# Altium PCB PCB1.PcbDoc
Units mm, origin at the board's own origin, x right, y up, seen from the top; angles counter-clockwise.
Board outline 31.12 x 27.35 mm, 4 copper layers (Top Layer, Int1 (GND), Int2 (Gnd), Bottom Layer), stack 1.57 mm thick; 34 components, 27 nets, 168 pads, 63 vias.
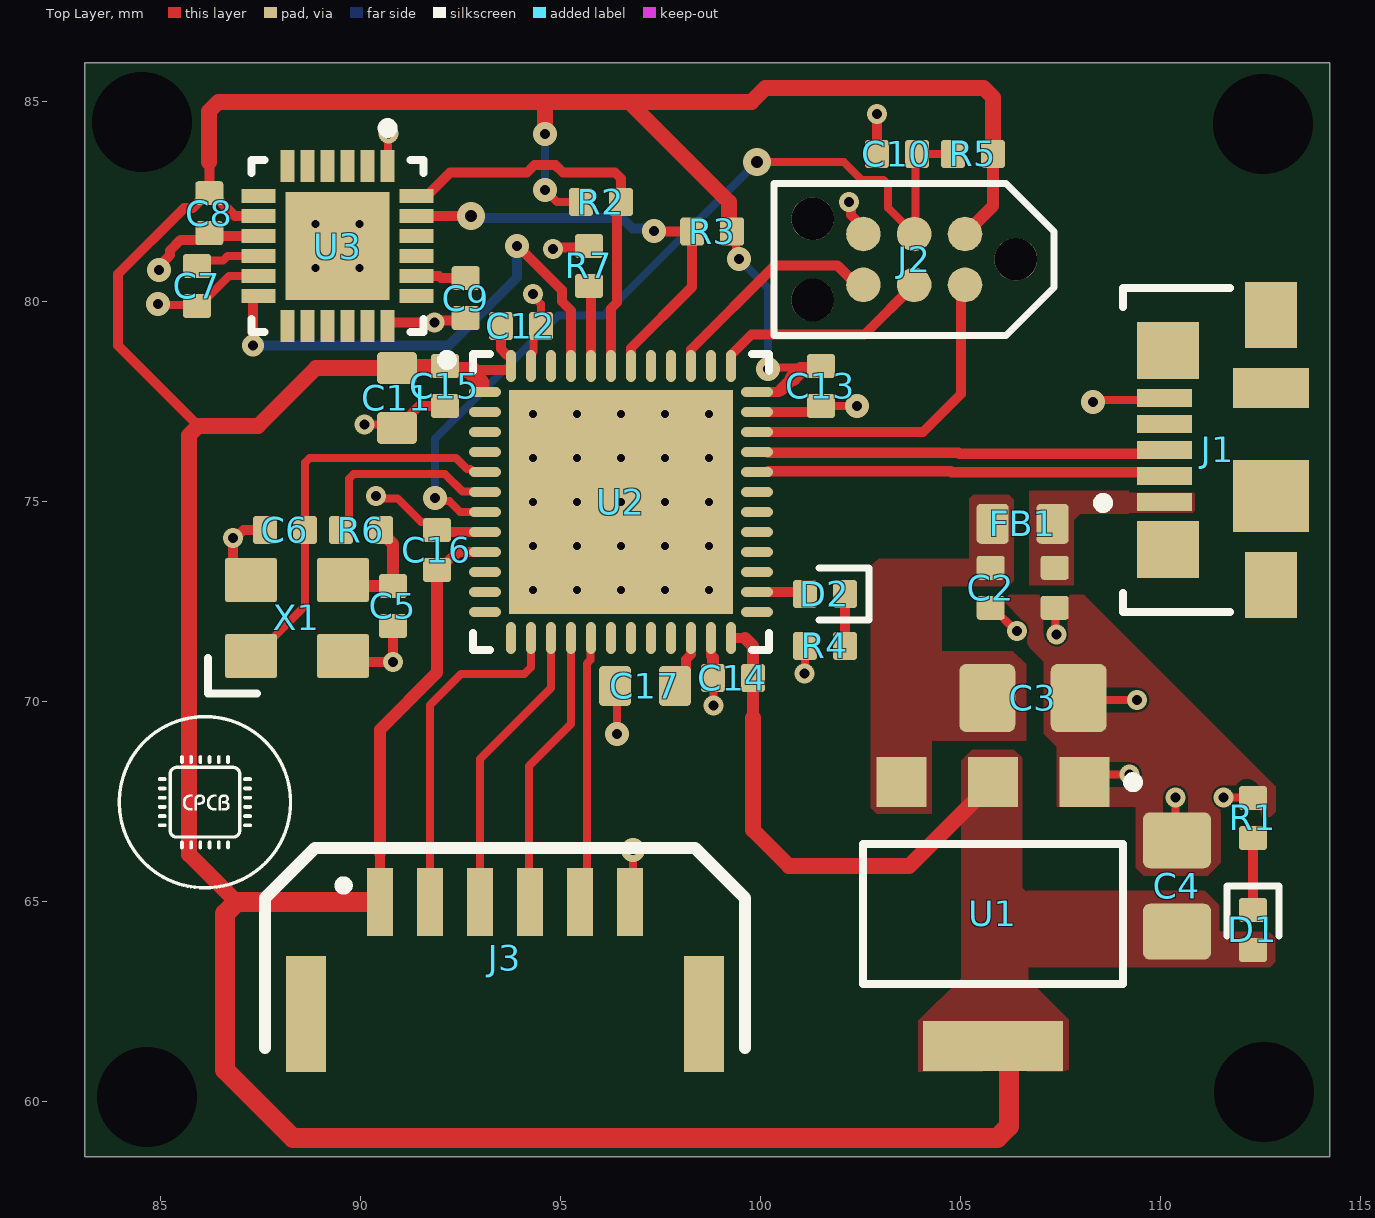
[diagram p0: Top Layer view]
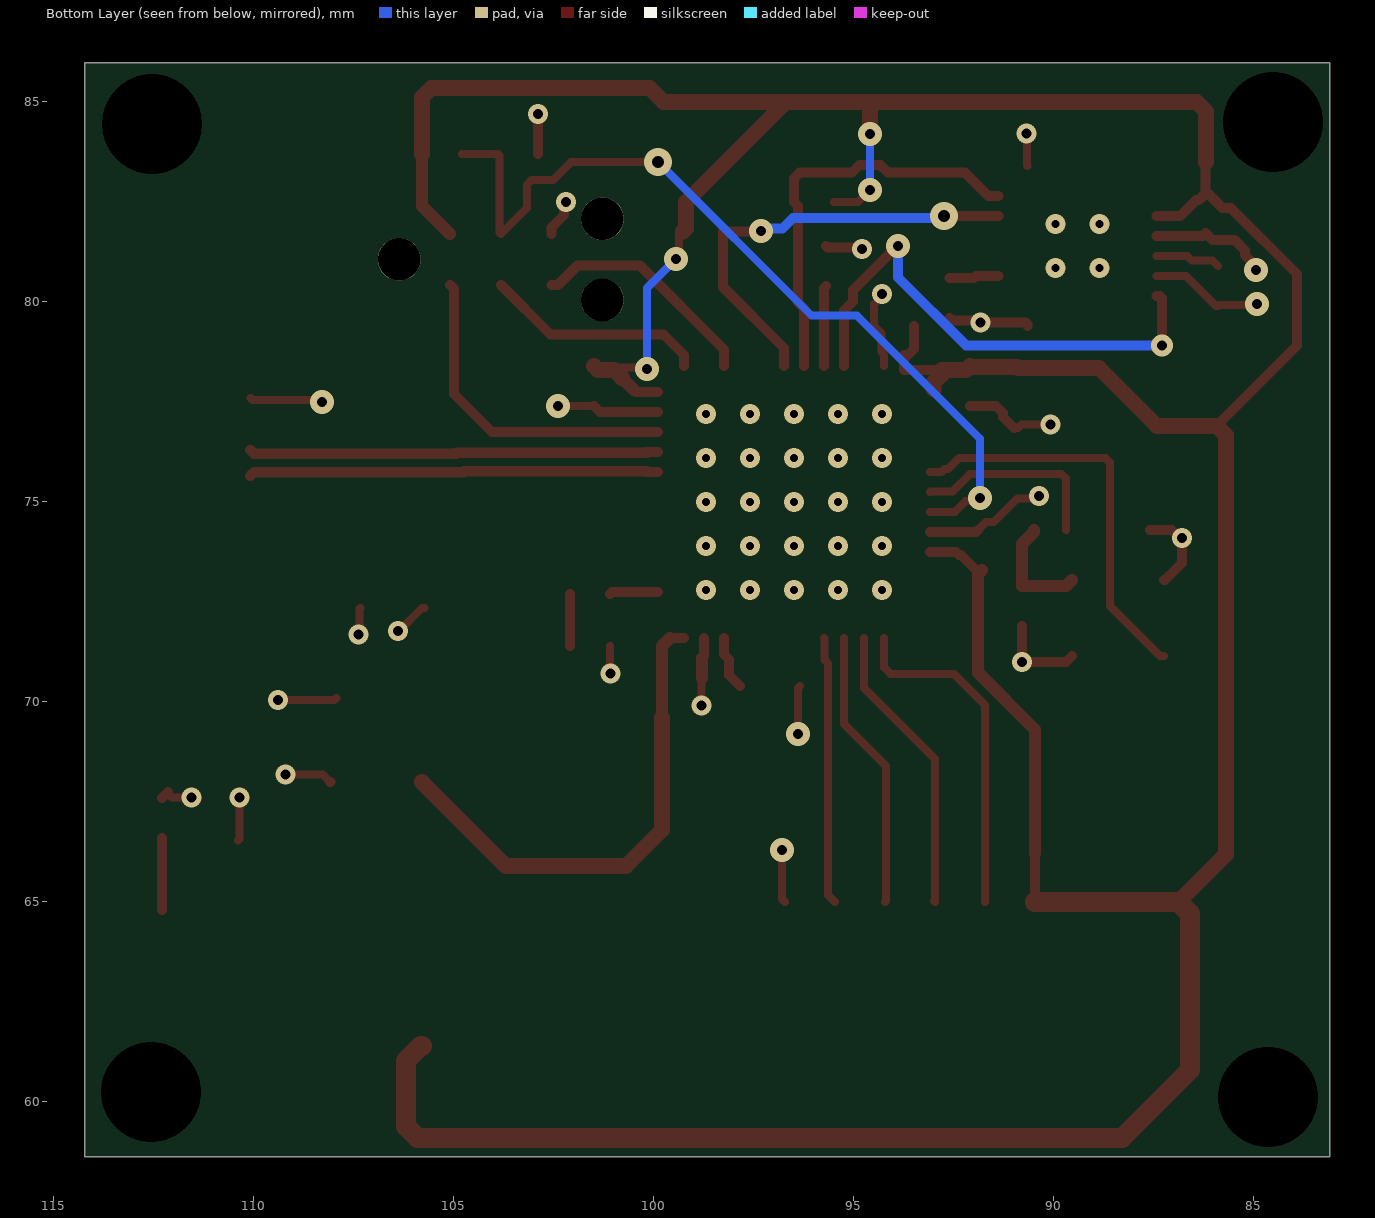
[diagram p1: Bottom Layer view, seen from below]
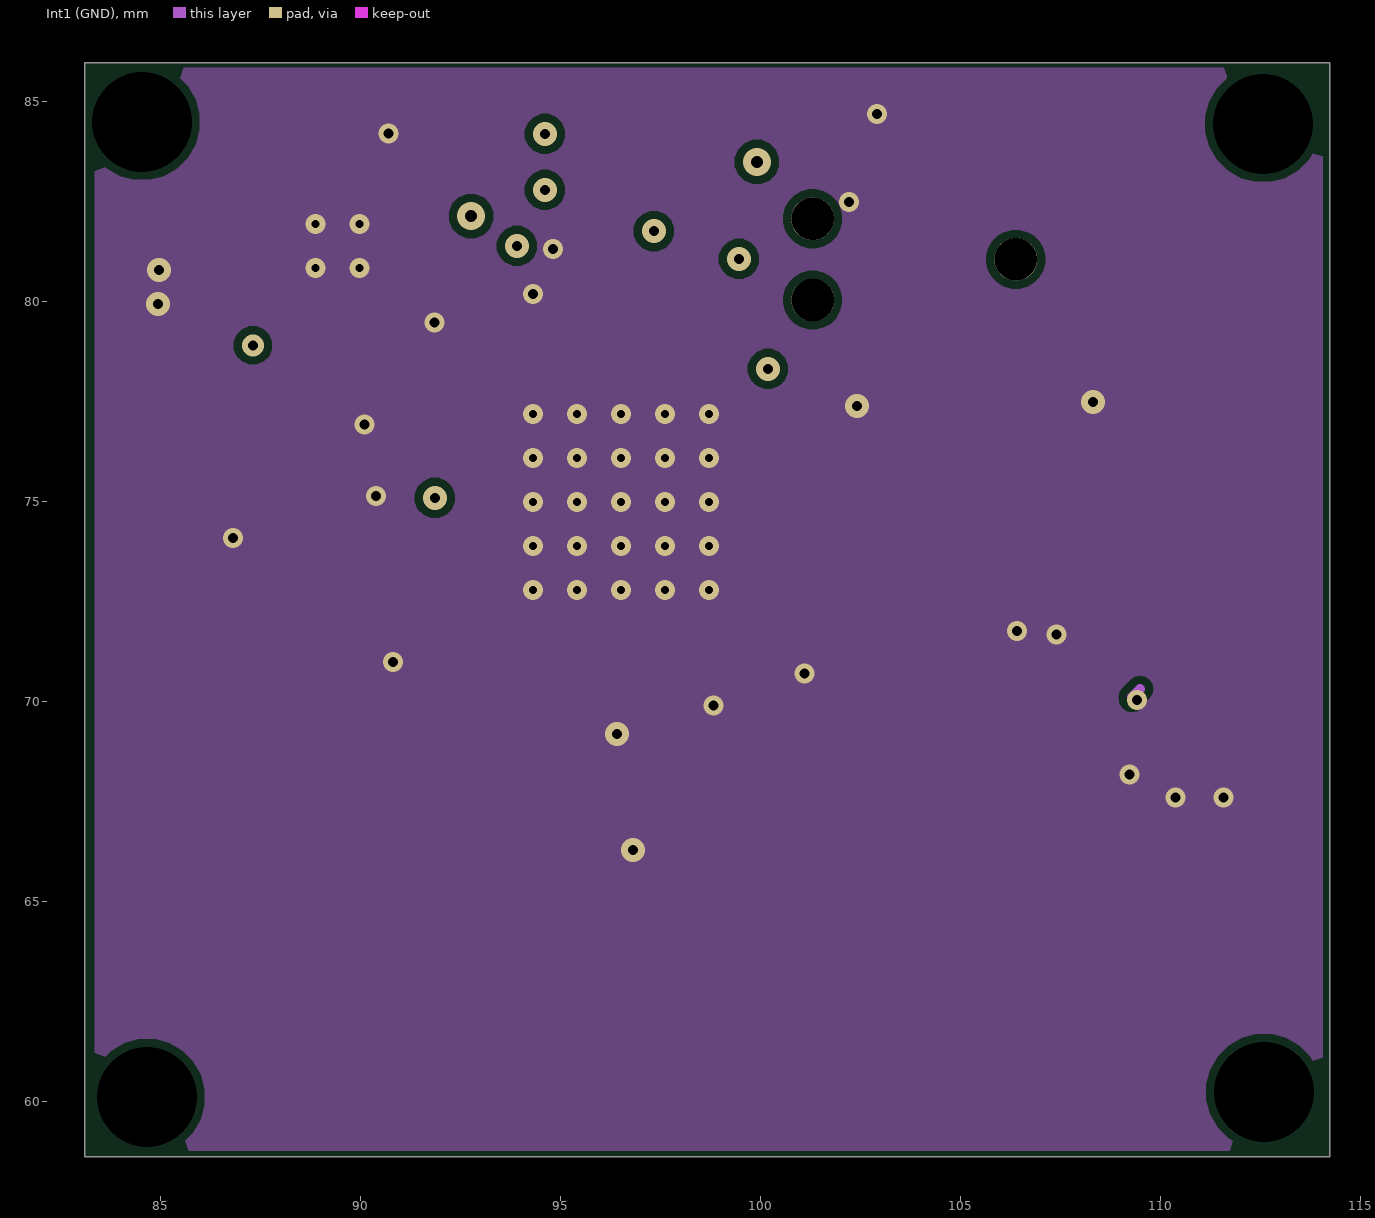
[diagram p2: Int1 (GND)]
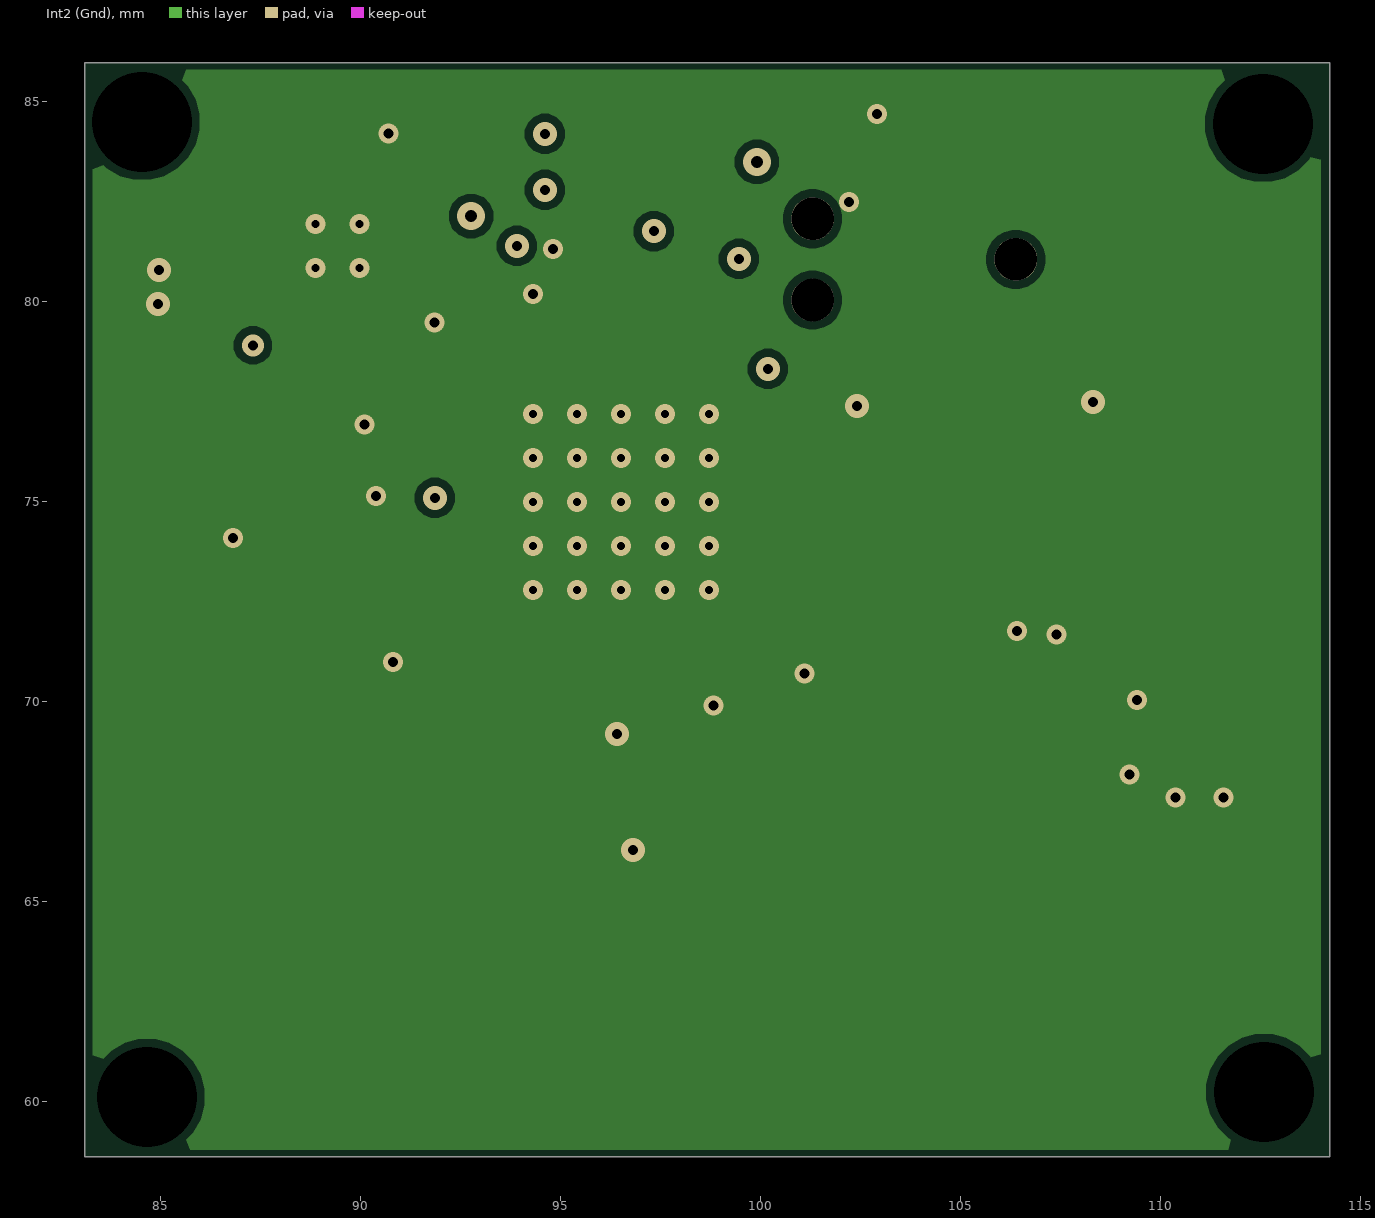
[diagram p3: Int2 (Gnd)]
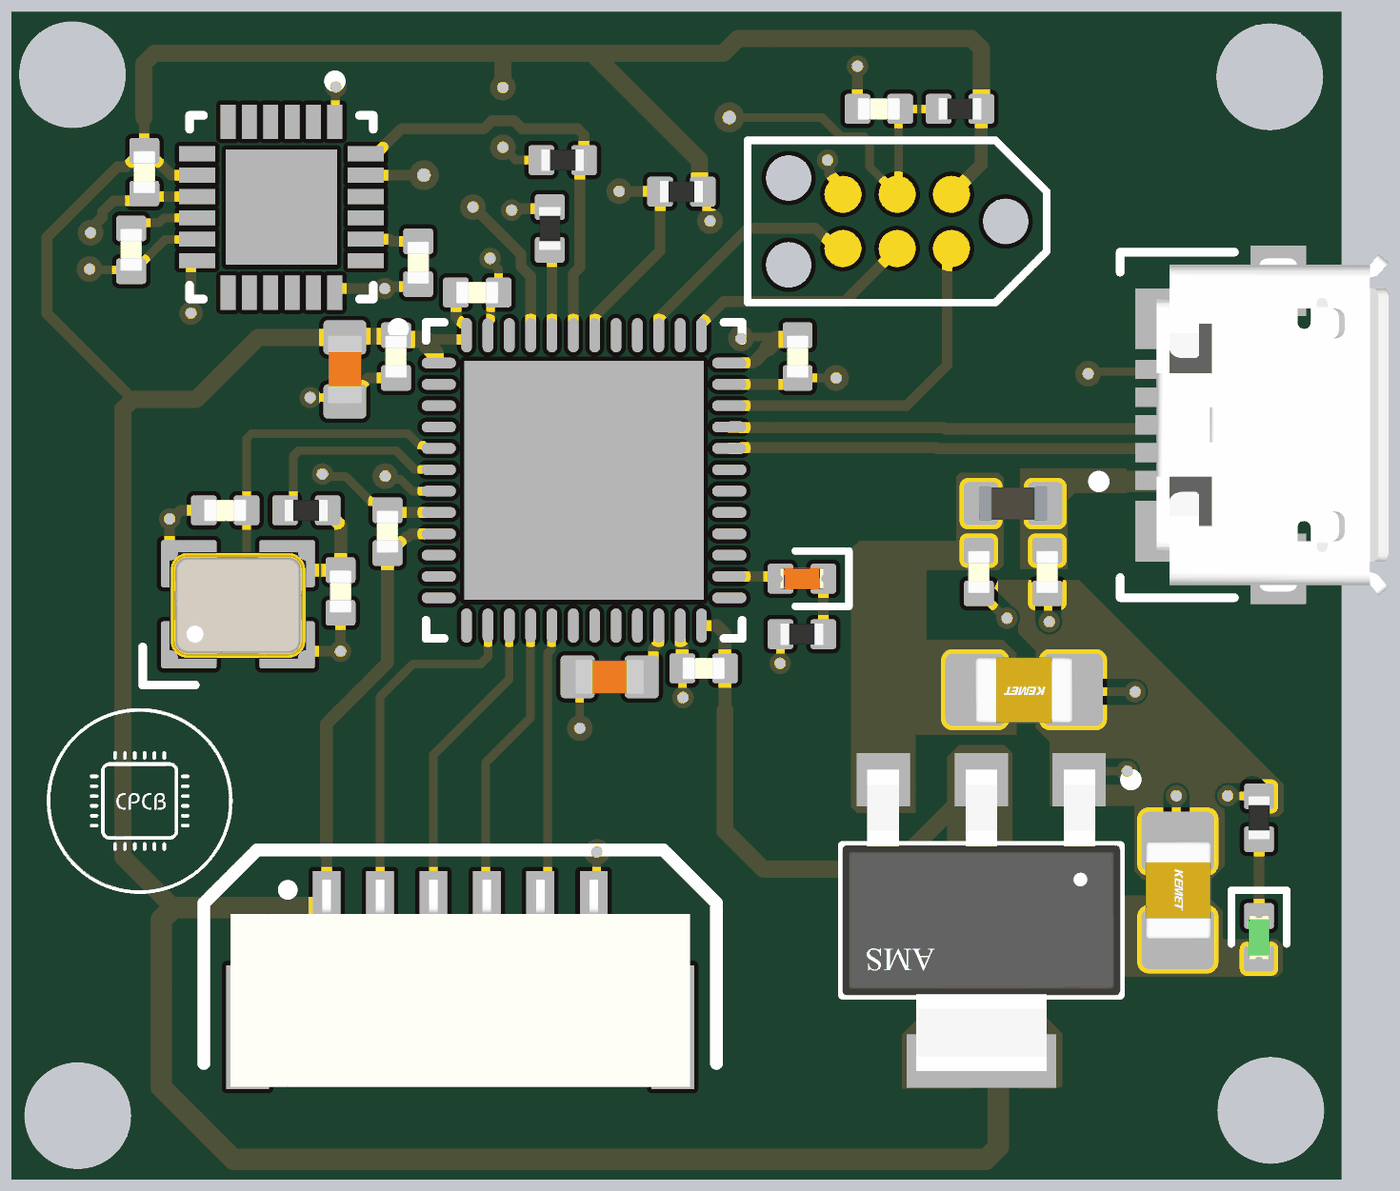
[diagram p4: 3D render of the assembled board from above, using the file's embedded part models]

## Layer stack, top to bottom
Top Solder: solder mask 0.0254, SM-001, Dk 4
Top Layer: signal copper 0.035
Dielectric 1: prepreg 0.2, PP-017, Dk 4.6
Int1 (GND): signal copper 0.0175
Dielectric 3: core 1.065, Core-039, Dk 4.6
Int2 (Gnd): signal copper 0.0175
Dielectric 5: prepreg 0.2, PP-017, Dk 4.6
Bottom Layer: signal copper 0.035
Bottom Solder: solder mask 0.0254, SM-001, Dk 4

## Board outline
83.1,58.625 83.1,85.975 114.225,85.975 114.225,58.625

## Design rules (kind name [scope] priority, off if disabled: settings)
Clearance [All] p1: gap=0.15 ignorepadtopadclearanceinfootprint=FALSE
DiffPairsRouting [All] p1: maxlimit=0.254 minlimit=0.203 mostfreqgap=0.254 toplayer_maxgap=0.203 toplayer_prefgap=0.203 toplayer_minwidth=0.26 toplayer_maxwidth=0.26 toplayer_prefwidth=0.26 bottomlayer_maxgap=0.203 bottomlayer_prefgap=0.203 bottomlayer_minwidth=0.26 bottomlayer_maxwidth=0.26 bottomlayer_prefwidth=0.26 impedanceprofiledriven=TRUE impedanceprofileid={43AACB27-954E-406C-94EB-1F25EBC5CF37} impedanceprofilevalue=90.000000 maxuncoupledlength=12.7
PolygonConnect [All] p1: connectstyle=Direct reliefconductorwidth=0.254 reliefentries=4 polygonreliefangle="90 Angle" airgapwidth=0.254
RoutingVias [All] p1: holewidth=0.3 width=0.7 viastyle="Through Hole" minholewidth=0.25 minwidth=0.55 maxholewidth=0.4 maxwidth=0.9
SolderMaskExpansion [All] p1: expansion=0.102 istentingtop=FALSE
SupplyNets "Schematic Supply Nets_3" [InNet('GND')] p1: voltage=0.000
SupplyNets "Schematic Supply Nets_2" [InNet('+5V')] p2: voltage=0.000
SupplyNets "Schematic Supply Nets_1" [InNet('VBUS')] p3: voltage=0.000
SupplyNets "Schematic Supply Nets" [InNet('+3V3')] p4: voltage=0.000
Width [All] p1: maxlimit=1 minlimit=0.2 preferedwidth=0.3 midlayer1_minwidth=0.254 midlayer1_maxwidth=0.254 midlayer1_prefwidth=0.254 midlayer2_minwidth=0.254 midlayer2_maxwidth=0.254 midlayer2_prefwidth=0.254 minimp=50.000000 maximp=50.000000 favimp=50.000000
29 further rules are at their usual default settings.

## Classes and differential pairs
differential pair class DIFF_USB: USB_D
differential pair USB_D: +USB_D_P -USB_D_N

## Components (designator, comment, footprint, x,y, rotation, side; value= is the part's Value field where it differs from the comment)
C1 "2u2" CAP_0402 107.343,72.856 r90 top
C2 "2u2" CAP_0402 105.743,72.856 r90 top
C3 "22u" CAP_0805 106.8,70.1 r180 top
C4 "22u" CAP_0805 110.4,65.4 r270 top
C5 "10p" CAP_0402 90.8,72.4 r270 top
C6 "10p" CAP_0402 88.1,74.3 r180 top
C7 "100n" CAP_0402 85.9,80.4 r90 top
C8 "10n" CAP_0402 86.208,82.22 r90 top
C9 "10n" CAP_0402 92.617,80.098 r90 top
C10 "100n" CAP_0402 103.4,83.7 r0 top
C11 "2.2u" CAP_0603 90.9,77.6 r90 top
C12 "100n" CAP_0402 94,79.4 r180 top
C13 "100n" CAP_0402 101.5,77.9 r90 top
C14 "100n" CAP_0402 99.3,70.6 r0 top
C15 "100n" CAP_0402 92.1,77.9 r90 top
C16 "100n" CAP_0402 91.9,73.8 r270 top
C17 "2.2u" CAP_0603 97.1,70.4 r0 top
D1 "GREEN" LED_0402_GREEN 112.3,64.3 r90 top
D2 "RED" LED_0402_RED 101.6,72.7 r0 top
FB1 "120R" FB_0603 106.543,74.456 r180 top
J1 "473460001" FP-473460001-MFG 112.4,76.3 r90 top
J2 "TC2030-NL" TC2030-NL-FP 103.83,81.065 r180 top
J3 "SM06B-GHS-TB" SM06B-GHS-TB 93.6,63.6 r0 top
R1 "10k" RES_0402 112.3,67.1 r270 top
R2 "1k" RES_0402 96,82.5 r0 top
R3 "1k" RES_0402 98.781,81.763 r180 top
R4 "1k" RES_0402 101.6,71.4 r0 top
R5 "10k" RES_0402 105.3,83.7 r0 top
R6 "0R" RES_0402 90,74.3 r0 top
R7 "10k" RES_0402 95.7,80.9 r270 top
U1 "AMS1117-3.3" FP-AMS1117-IPC_C 105.8,64.7 r270 top
U2 "STM32F411CEU6" STM-UFQFPN48_L 96.5,75 r0 top
U3 "MPU-6050" IS-QFN-24_V 89.417,81.398 r270 top
X1 "24MHz" XTAL_3225 88.4,72.1 r0 top

## Footprints (in the part's own frame and the unit in brackets; to place one, negate y for a bottom-side part, rotate by r counter-clockwise, add the part's x,y. Pads: shape width x height; smd on the part's side, far side on the other; paste and mask are expansions set on the pad)
CAP_0402 [mm]
  rrect25% 0.6x0.7 smd: 1(-0.5,0) 2(0.5,0)
  body extent -0.5,-0.26 0.5,0.26, height 0.37
CAP_0603 [mm]
  rrect25% 0.8x1 smd: 1(-0.75,0) 2(0.75,0)
  body extent -0.8,-0.4 0.8,0.4, height 0.51
CAP_0805 [mm]
  rrect25% 1.4x1.7 smd: 1(-1.143,0) 2(1.143,0)
  body extent -1.15,-0.76 1.15,0.79, height 1.01
FB_0603 [mm]
  rrect25% 0.8x1 smd: 1(-0.75,0) 2(0.75,0)
  body extent -0.8,-0.4 0.8,0.4, height 0.81
FP-473460001-MFG [mm]
  rect 0.45x1.38 smd paste+0 mask+0: 1(-1.3,2.31) 2(-0.65,2.31) 3(0,2.31) 4(0.65,2.31) 5(1.3,2.31)
  rect 1.425x1.55 smd paste+0 mask+0: 6(-2.488,2.225) 7(2.488,2.225)
  rect 1.65x1.3 smd paste+0 mask+0: 8(-3.375,-0.35) 11(3.375,-0.35)
  rect 1.8x1.9 smd paste+0 mask+0: 9(-1.15,-0.35)
  rect 1x1.9 smd paste+0 mask+0: 10(1.55,-0.35)
  silkscreen extent -4.05,0.67 4.05,3.97, body extent -4.3,-2.48 4.3,3.45, height 0.25
FP-AMS1117-IPC_C [mm]
  rect 1.25x1.25 smd paste+0 mask+0: 1(-3.295,2.29) 2(-3.295,0) 3(-3.295,-2.29)
  rect 1.25x3.5 smd paste+0 mask+0: 4(3.295,0)
  silkscreen extent -3.42,-3.25 1.75,3.63, body extent -3.9,-3.35 3.9,3.35, height 0.25
IS-QFN-24_V [mm] "QFN, 24-Leads, Body 4x4mm, Pitch 0.5mm, Thermal Pad 2.7x2.6mm"
  rect 0.8x0.35 smd: 1(-2,1.25) 2(-2,0.75) 3(-2,0.25) 4(-2,-0.25) 5(-2,-0.75) 6(-2,-1.25) 13(2,-1.25) 14(2,-0.75) 15(2,-0.25) 16(2,0.25) 17(2,0.75) 18(2,1.25)
  rect 0.35x0.85 smd mask+0.102: 7(-1.25,-1.975) 8(-0.75,-1.975) 9(-0.25,-1.975) 10(0.25,-1.975) 11(0.75,-1.975) 12(1.25,-1.975) 19(1.25,1.975) 20(0.75,1.975) 21(0.25,1.975) 22(-0.25,1.975) 23(-0.75,1.975) 24(-1.25,1.975)
  rect 2.7x2.6 smd: 25(0,0)
  silkscreen extent -3.07,-2.15 2.15,2.15, body extent -2,-2 2,2, height 0.95
LED_0402_GREEN [mm]
  rrect25% 0.6x0.7 smd: A(-0.5,0) K(0.5,0)
  silkscreen extent -0.15,-0.65 1.1,0.65, body extent -0.51,-0.25 0.51,0.25, height 0.45
LED_0402_RED [mm]
  rrect25% 0.6x0.7 smd: A(-0.5,0) K(0.5,0)
  silkscreen extent -0.15,-0.65 1.1,0.65, body extent -0.51,-0.25 0.51,0.25, height 0.45
RES_0402 [mm]
  rrect25% 0.6x0.7 smd: 1(-0.5,0) 2(0.5,0)
  body extent -0.5,-0.25 0.5,0.25, height 0.3
SM06B-GHS-TB [mm]
  rect 0.65x1.7 smd: 1(-3.125,1.4) 2(-1.875,1.4) 3(-0.625,1.4) 4(0.625,1.4) 5(1.875,1.4) 6(3.125,1.4)
  rect 1x2.9 smd: ""(-4.975,-1.4) ""(4.975,-1.4)
  silkscreen extent -6,-2.25 6,2.75, body extent -5.38,-2.8 5.38,2.05, height 4.26
STM-UFQFPN48_L [mm] "QFN, 48-Leads, Body 7.1x7.1mm, Pitch 0.5mm, Thermal Pad 5.6x5.6mm, IPC High Density"
  oval 0.8x0.25 smd: 1(-3.4,2.75) 2(-3.4,2.25) 3(-3.4,1.75) 4(-3.4,1.25) 5(-3.4,0.75) 6(-3.4,0.25) 7(-3.4,-0.25) 8(-3.4,-0.75) 9(-3.4,-1.25) 10(-3.4,-1.75) 11(-3.4,-2.25) 12(-3.4,-2.75) 25(3.4,-2.75) 26(3.4,-2.25) 27(3.4,-1.75) 28(3.4,-1.25) 29(3.4,-0.75) 30(3.4,-0.25) 31(3.4,0.25) 32(3.4,0.75) 33(3.4,1.25) 34(3.4,1.75) 35(3.4,2.25) 36(3.4,2.75)
  oval 0.25x0.8 smd: 13(-2.75,-3.4) 14(-2.25,-3.4) 15(-1.75,-3.4) 16(-1.25,-3.4) 17(-0.75,-3.4) 18(-0.25,-3.4) 19(0.25,-3.4) 20(0.75,-3.4) 21(1.25,-3.4) 22(1.75,-3.4) 23(2.25,-3.4) 24(2.75,-3.4) 37(2.75,3.4) 38(2.25,3.4) 39(1.75,3.4) 40(1.25,3.4) 41(0.75,3.4) 42(0.25,3.4) 43(-0.25,3.4) 44(-0.75,3.4) 45(-1.25,3.4) 46(-1.75,3.4) 47(-2.25,3.4) 48(-2.75,3.4)
  rect 5.6x5.6 smd: 49(0,0)
  silkscreen extent -4.47,-3.7 3.7,3.7, body extent -3.55,-3.55 3.55,3.55, height 0.6
TC2030-NL-FP [mil]
  round 33.98 smd paste-16.99: 1(-50,-25) 2(-50,25) 3(0,-25) 4(0,25) 5(50,-25) 6(50,25)
  round 42.01 hole 42.01 unplated: MH(-100,0) MH(100,-40) MH(100,40)
  silkscreen extent -138,-75 138,75
XTAL_3225 [mm]
  rrect10% 1.3x1.1 smd: 1(-1.15,-0.95) 2(1.15,-0.95) 3(1.15,0.95) 4(-1.15,0.95)
  silkscreen extent -2.23,-1.89 -1,-1, body extent -1.6,-1.28 1.6,1.22, height 0.61

## Part data
C1 C2 C5 C6 C7 C8 C9 C10 C12 C13 C14 C15 C16: library part CAP_0402, "Capacitor SMD 0402"
C3 C4: library part CAP_0805, "Capacitor SMD 0805"
C11 C17: library part CAP_0603, "Capacitor SMD 0603"
D1: library part LED_0402_GREEN, "LED 0402 GREEN SMD"
D2: library part LED_0402_RED, "LED 0402 RED SMD"
FB1: library part FB_0603, "Ferrite Bead SMD 0603"
J1: library part CMP-2000-05246-2, "CONN RCPT USB2.0 MICRO B SMD R/A", Current Rating=1.8A, Manufacturer=Molex, Package=0, Temperature="-30°C to +85°C", Temperature Range High=+85°C, Temperature Range Low=-30°C, Voltage Rating=30V, Automotive=No, Category=Conn, ComponentLink2Description=Datasheet, ComponentLink2URL=https://www.molex.com/webdocs/datasheets/pdf/en-us/0473460001_IO_CONNECTORS.pdf, Conn Orientation="Right Angle", Contact Material=Gold,Nickel, Device Class L1=Connectors, Device Class L2="USB Connectors", Device Class L3=unset, Digikey Description="CONN RCPT USB2.0 MICRO B SMD R/A", Footprint Url=https://www.molex.com/pdm_docs/sd/473460001_sd.pdf, Height=2.945mm, Is Female=yes, Lead Free=Yes, Manufacturer Part Number=473460001, Number Of Contacts=5, Octopart=https://octopart.com/47346-0001-molex-7164928, Pitch=0.65mm, RoHS=TRUE, Shielding=true, Usb Standard="USB 2.0"
J2: "Tag-Connect No-Solder SWD Debug Connector (No Legs) DO NOT PLACE", Manufacturer=Tag-Connect, Manufacturer Part Number=TC2030-NL-FP
J3: "Header Connector 6 Position 1.25MM Pitch SMD Horizontal JST GH", Manufacturer=JST, Manufacturer Part Number=SM06B-GHS-TB
R1 R2 R3 R4 R5 R6 R7: library part RES_0402, "Resistor SMD 0402"
U1: library part CMP-209535-000001-1, "LDO Voltage Regulators 1A, 3.3V", Dropout Voltage=1.1V, Manufacturer="Advanced Monolithic Systems", Max Junction Temp=+125°C, Max Power Dissipation=1.2W, Max Supply Voltage=15V, Nominal Supply Current=5mA, Output Current=1A, Output Voltage=3.3V, Package=AMS1117, Temperature="-40°C to +125°C", Temperature Range Low=-40°C, Automotive=No, Category=IC, ComponentLink2Description=Datasheet, ComponentLink2URL=http://www.advanced-monolithic.com/pdf/ds1117.pdf, Device Class L1="Integrated Circuits (ICs)", Device Class L2="Power Management ICs", Device Class L3="Voltage Regulators - Linear", Height=1.8mm, Ipc Land Pattern Name=SOT229P700X180-4, Lead Free=Yes, Manufacturer Part Number=AMS1117-3.3, Number Of Outputs=1, Octopart=https://octopart.com/ams1117-3.3-advanced+monolithic+systems-25899300, Output Type=Fixed, RoHS=TRUE, Standoff Height=0.64mm, Temperature Range High=+125°C
U2: library part CMP-0243-00165-1, "ARM Cortex-M4 32-bit MCU+FPU, 512 KB Flash, 128 KB RAM, 36 I/Os, 48-Pin UFQFPN, -40 to 85 degC, Tray", I/Os (High Current)=36, Operating Frequency(F) (Processor speed) (MHz)=100, Package Description=UFQFPN48, Package Reference="48-Pin Ultra Thin Fine Pitch Quad Flat No-Lead, 7 x 7 x 0.6 mm Body, 0.5 mm Pitch, Exposed Pad", Supply Voltage(Vcc) min (V)=1.7, ComponentLink1Description="Manufacturer URL", ComponentLink1URL=http://www.st.com/, ComponentLink2Description=Datasheet, ComponentLink2URL=http://www.st.com/st-web-ui/static/active/en/resource/technical/document/datasheet/DM00115249.pdf, Core="ARM Cortex-M4", DatasheetVersion="Rev. 6", FLASH Size (Prog) (kB)=512, Internal RAM Size (kB)=128, Mounting Technology="Surface Mount", Packing=Tray
U3: library part CMP-1753-00002-2, "3-Axis Gyroscope, Accelerometer and a Digital Motion Processor(TM) (DMP), 2.375 to 3.46 V, -40 to 85 degC, 24-Pin QFN, RoHS, Tape and Reel", Manufacturer=InvenSense, Standard Package=5,000, Category=Sensors,Transducers, Datasheet URL=http://datasheet.octopart.com/MPU-6050-InvenSense-datasheet-14421344.pdf, Datasheet Version="Rev. 3.3, 05/2012", Dynamic Catalog=MPU-6000™Series, Family=Multifunction, Featured Product=MPU-60506-Axis,IntegratedI²CSolution, Manufacturer URL=http://www.invensense.com/, Online Catalog=MPU-6000™Series, Other Names="1428-1007-2 / MPU6050", Output Type=Digital, Sensor Type=MotionTracking, Unit PriceUSD=Digital
X1: library part TSX-3225_24.0000MF15X-AC, "Crystal SMD 24MHz 10PPM 7pF 3225", Manufacturer=Epson, Manufacturer Part Number="TSX-3225 24.0000MF15X-AC"

## Free pads (board coordinates)
  round 1.524 hole 2.5 unplated paste-2539.97: 2(84.65,60.125) 3(112.55,84.45) 4(112.575,60.25) 5(84.525,84.5)

## Via types
v1: diameter 0.5, hole 0.2, Top Layer to Bottom Layer, tented both sides, 29 vias
v2: diameter 0.5, hole 0.25, Top Layer to Bottom Layer, tented both sides, 18 vias
v3: diameter 0.6, hole 0.25, Top Layer to Bottom Layer, tented both sides, 13 vias
v4: diameter 0.7, hole 0.3, Top Layer to Bottom Layer, tented both sides, 2 vias
v5: diameter 0.55, hole 0.25, Top Layer to Bottom Layer, tented both sides, 1 vias

## Nets (pads, with @x,y where several pads share a name; then routed paths per layer and width w, separated by ;. In a path a pad name is that pad's centre, name@x,y a point inside that pad or via, vN(x,y) a via of type N, cw(c..) or ccw(c..) an arc to the next point about the centre after c; other vN are vias at no path point)
+3V3: C4.2 C8.2 C11.2 C12.2 C13.2 C14.2 C15.2 C16.2 D1.A J2.1 J3.1 R2.1 R3.1 R5.2 U1.2 U1.4 U2.1 U2.9 U2.24 U2.36 U2.48 U3.8 | length 125.5
  Top Layer w0.2: v3(94.6,82.8) 94.602,82.8 94.902,82.5 R2.1 ; R3.1 99.373,81.67 99.373,81.152 v3(99.45,81.075) ; v3(100.175,78.325) 100.212,78.363 101.462,78.363 C13.2
  Top Layer w0.25: 85.934,76.9 83.925,78.909 83.925,80.698 85.572,82.345 85.783,82.345 86.158,82.72 C8.2 ; 86.2,83.5 86.208,83.492 C8.2 ; U3.8 86.845,82.148 86.448,82.545 86.383,82.545 C8.2 ; 90.474,66.228 90.475,66.227 J3.1 ; C16.2@91.95,73.3 92.325,73.675 92.375,73.675 92.45,73.75 U2.9 ; 92.803,78.3 93.75,78.3 U2.48 93.75,78.675 93.646,78.675 93.5,78.821 C12.2 ; U2.24 99.6,71.6 ; U2.36 100.45,77.75 100.5,77.8
  Top Layer w0.3: 90.474,66.228 90.474,69.31 91.9,70.736 91.9,73.2 C16.2@91.8,73.3 ; 99.6,71.6 99.8,71.4 C14.2 99.8,69.6 ; 100.5,77.8 100.8,78.1 ; J2.1 105.8,82.4 R5.2
  Top Layer w0.4: 86.2,83.5 86.2,84.766 86.434,85 94.6,85 ; 86.893,65 85.7,66.193 85.7,76.666 85.934,76.9 87.425,76.9 88.875,78.35 C11.2 90.925,78.375 92.075,78.375 C15.2 92.2,78.3 92.803,78.3 92.803,78.189 93.015,77.978 U2.1@93.015,77.825 ; v3(94.6,84.2) 94.6,85 ; R3.1 99.2,81.843 99.2,82.5 96.7,85 ; 99.8,69.6 99.8,66.8 100.7,65.9 103.705,65.9 U1.2 ; 100.8,78.1 101,78.3 101.4,78.3 C13.2 ; R5.2 105.8,85.116 105.566,85.35 100.11,85.35 99.76,85 96.7,85 ; 94.6,85 96.7,85
  Top Layer w0.5: J3.1 86.893,65 86.6,64.707 86.6,60.8 88.3,59.1 105.907,59.1 106.2,59.393 106.2,61.03 105.825,61.405 U1.4
  Bottom Layer w0.2: v3(94.6,82.8) v3(94.6,84.2) ; v3(99.45,81.075) 100.175,80.35 v3(100.175,78.325)
+5V: C2.2 C3.2 FB1.2 U1.3
GND: C1.1 C2.1 C3.1 C4.1 C5.2 C6.2 C7.1 C8.1 C9.1 C10.1 C11.1 C12.1 C13.1 C14.1 C15.1 C16.1 C17.1 J1.5 J2.5 J3.6 R1.1 R4.1 R7.1 U1.1 U2.8 U2.23 U2.35 U2.47 U2.49 U3.1 U3.9 U3.11 U3.18 U3.25 X1.2 X1.4 | length 39.2
  Top Layer w0.2: v3(84.925,79.95) 84.95,79.925 85.875,79.925 C7.1 ; C7.1@85.95,79.9 86.698,80.648 U3.11 ; v2(90.09,76.941) 90.809,76.941 C11.1 ; v2(90.375,75.15) 90.432,75.093 90.914,75.093 91.506,74.5 91.7,74.5 C16.1 ; U3.1 90.679,83.41 90.679,84.202 v2(90.691,84.214) ; U2.47 94.25,78.689 94.311,78.75 94.311,79.211 C12.1 94.5,79.944 94.3,80.144 v2(94.3,80.2) ; C17.1 96.4,70.35 v3(96.4,69.2) ; J3.6 96.8,65.075 v3(96.8,66.3) ; C14.1 98.808,70.592 98.808,69.924 v2(98.815,69.916) ; v2(101.09,70.716) 101.095,70.721 101.095,71.395 R4.1 ; C13.1 v3(102.4,77.4) ; C2.1 105.793,72.356 106.374,71.775 v2(106.4,71.775) ; C1.1 107.367,72.332 107.367,71.715 v2(107.39,71.691) ; C3.1@107.968,70.075 C3.1 107.993,70.05 v2(109.4,70.05) ; U1.1@108.11,67.975 U1.1 108.286,68.191 v2(109.215,68.191) ; v3(108.3,77.5) 108.35,77.55 110.04,77.55 J1.5 ; v2(110.365,67.616) 110.365,66.578 C4.1 ; v2(111.565,67.616) 111.573,67.608 112.05,67.608 112.148,67.706 R1.1@112.148,67.752
  Top Layer w0.25: v3(84.95,80.8) 84.95,80.895 85.225,81.17 85.225,81.291 85.483,81.548 86.036,81.548 C8.1 86.279,81.648 U3.9 ; X1.4 87.225,73.05 86.8,73.475 v2(86.8,74.1) 86.862,74.1 87.062,74.3 C6.2 ; X1.2 89.7,71 v2(90.8,71) C5.2 ; U3.18 90.667,79.443 90.717,79.493 v2(91.836,79.493) ; C11.1@91,76.85 91.275,77.125 91.275,77.225 91.45,77.4 C15.1 ; v2@91.836,79.598 91.893,79.541 92.559,79.541 C9.1 ; C16.1 91.95,74.25 U2.8 ; v2(94.805,81.328) 94.841,81.364 95.664,81.364 R7.1 ; U2.23 98.75,71.15 98.8,71.1 ; U2.35 101.35,77.25 C13.1 ; v2(102.2,82.5) 102.248,82.452 102.248,82.178 102.56,81.866 J2.5 ; C10.1 v2(102.9,84.7) ; U1.1 U1.1@108.095,68 ; R1.1@112.148,67.752 R1.1
  Top Layer w0.3: C14.1 98.8,71.1
  Int1 (GND) w0.254: v2@109.275,70.075 109.275,70.125 109.475,70.325
  other v1: 94.3,72.8 95.4,72.8 96.5,72.8 97.6,72.8 98.7,72.8 94.3,73.9 95.4,73.9 96.5,73.9 97.6,73.9 98.7,73.9 94.3,75 95.4,75 96.5,75 97.6,75 98.7,75 94.3,76.1 95.4,76.1 96.5,76.1 97.6,76.1 98.7,76.1 94.3,77.2 95.4,77.2 96.5,77.2 97.6,77.2 98.7,77.2 88.867,80.848 89.967,80.848 88.867,81.948 89.967,81.948
IMU_CPOUT: C9.2 U3.20 | length 1.2
  Top Layer w0.25: U3.20 91.951,80.648 92.001,80.598 C9.2
IMU_INT: U2.45 U3.12 | length 13
  Top Layer w0.25: v5(87.3,78.918) 87.3,80.098 87.35,80.148 U3.12 ; v3(93.9,81.4) 93.92,81.4 95.025,80.295 95.025,80.009 95.25,79.784 U2.45
  Bottom Layer w0.25: v5(87.3,78.918) 92.202,78.918 93.9,80.616 v3(93.9,81.4)
IMU_REGOUT: C7.2 U3.10 | length 1.6
  Top Layer w0.2: C7.2 86.032,81.032 86.55,81.032 86.666,81.148 U3.10
IMU_SCL: R3.2 U2.42 U3.23 | length 11
  Top Layer w0.25: U3.23 v4(92.752,82.148) ; U2.42 96.75,78.848 98.281,80.379 R3.2 98.276,81.767 97.328,81.767 v3(97.323,81.772)
  Bottom Layer w0.25: v4(92.752,82.148) 92.8,82.1 96.523,82.1 96.785,81.839 97.256,81.839 v3(97.323,81.772)
IMU_SDA: R2.2 U2.43 U3.24 | length 10.4
  Top Layer w0.25: U3.24 91.642,82.648 92.229,83.236 94.152,83.236 94.341,83.425 94.859,83.425 95.048,83.236 96.354,83.236 96.5,83.089 R2.2 96.4,82.4 96.4,79.986 96.25,79.836 U2.43
LED_PWR_K: D1.K R1.2 | length 1.8
  Top Layer w0.25: D1.K R1.2
MCU_BOOT0: R7.2 U2.44 | length 2
  Top Layer w0.25: R7.2 95.75,80.35 U2.44
MCU_LED_A: D2.A U2.26 | length 1.2
  Top Layer w0.25: U2.26 101.05,72.75 D2.A
MCU_LED_K: D2.K R4.2 | length 1.3
  Top Layer w0.25: R4.2 D2.K
MCU_NRST: C10.2 J2.3 R5.1 U2.7 | length 21.7
  Top Layer w0.2: v3(91.847,75.1) 91.924,75.023 92.207,75.023 92.48,74.75 U2.7 ; v4(99.9,83.5) 102.07,83.5 102.52,83.05 103.062,83.05 103.181,82.931 103.181,82.349 J2.3 103.865,81.735 103.865,83.665 C10.2 R5.1
  Bottom Layer w0.2: v3(91.847,75.1) 91.847,76.582 94.923,79.657 96.057,79.657 v4(99.9,83.5)
MCU_OSC_IN: C6.1 U2.5 X1.1 | length 10.1
  Top Layer w0.2: X1.1 87.35,71.15 88.6,72.4 C6.1 88.6,75.983 88.717,76.1 92.374,76.1 92.649,75.825 92.736,75.825 92.811,75.75 U2.5
MCU_OSC_OUT: R6.1 U2.6 | length 4.9
  Top Layer w0.2: R6.1@89.7,74.3 89.7,75.583 89.817,75.7 92.096,75.7 92.536,75.26 93.09,75.26 U2.6
MCU_PA4: J3.2 U2.14 | length 8.6
  Top Layer w0.2: J3.2 91.725,69.925 92.5,70.7 94.083,70.7 94.25,70.867 U2.14
MCU_PA5: J3.3 U2.15 | length 7.4
  Top Layer w0.2: J3.3@93,65.025 J3.3 92.975,68.575 94.75,70.35 U2.15
MCU_PA6: J3.4 U2.16 | length 7
  Top Layer w0.2: J3.4 94.2,65.025 94.2,68.4 95.25,69.45 U2.16
MCU_PA7: J3.5 U2.17 | length 6.7
  Top Layer w0.2: J3.5 95.65,65.175 95.65,70.966 95.74,71.056 95.74,71.59 U2.17
MCU_SWCLK: J2.4 U2.37 | length 5.6
  Top Layer w0.25: U2.37 99.25,78.675 99.765,79.19 102.591,79.19 J2.4
MCU_SWDIO: J2.2 U2.34 | length 8.3
  Top Layer w0.25: U2.34 104.05,76.75 105,77.7 105,80.33 J2.2
MCU_SWO: J2.6 U2.39 | length 5.8
  Top Layer w0.25: U2.39 98.25,78.811 100.346,80.907 101.917,80.907 102.394,80.43 J2.6
MCU_VCAP1: C17.2 U2.22 | length 1.4
  Top Layer w0.25: C17.2 98.125,70.675 98.125,71.064 98.25,71.189 U2.22
USB_D_N: J1.2 U2.32 | length 10.2
  Top Layer w0.26: U2.32 100.165,75.75 100.183,75.768 104.743,75.768 104.768,75.743 109.997,75.743 J1.2
USB_D_P: J1.3 U2.33 | length 10.2
  Top Layer w0.26: U2.33 100.165,76.25 100.183,76.232 104.935,76.232 104.96,76.207 109.997,76.207 J1.3
VBUS: C1.2 FB1.1 J1.1
XTAL_IN: C5.1 R6.2 X1.3 | length 2.8
  Top Layer w0.3: X1.3 89.7,72.9 C5.1 90.8,73.95 90.5,74.25 R6.2
pads on no net: J1.4 J1.6 J1.7 J1.8 J1.9 J1.10 J1.11 J2.MH J3. U2.2 U2.3 U2.4 U2.10 U2.11 U2.12 U2.13 U2.18 U2.19 U2.20 U2.21 U2.25 U2.27 U2.28 U2.29 U2.30 U2.31 U2.38 U2.40 U2.41 U2.46 U3.2 U3.3 U3.4 U3.5 U3.6 U3.7 U3.13 U3.14 U3.15 U3.16 U3.17 U3.19 U3.21 U3.22

## Polygon pours and split planes (outlines as drawn)
+3V3 on Top Layer "+3V3_L01_P003" (solid, pour order 3): 111.455,64.287 111.481,64.262 112.7,64.262 112.852,64.11 112.852,63.5 112.725,63.373 106.68,63.373 106.68,63.068 107.696,62.052 107.696,60.808 107.721,60.782 107.696,60.757 103.937,60.757 103.937,62.027 105.004,63.094 105.004,68.529 105.283,68.809 106.324,68.809 106.528,68.605 106.528,65.354 106.629,65.253 106.655,65.278 111.1,65.278 111.455,64.922
GND on Top Layer "GND_L01_P010" (solid, pour order 10): 112.875,67.875 112.875,67.25 112.75,67.125 111.5,67.125 111.5,65.975 111.175,65.65 109.575,65.65 109.375,65.85 109.375,67.375 107.4,67.375 107.4,68.875 107.075,69.2 107.075,71 106.661,71.414 105.35,71.432 105.35,72.675 108.075,72.675
+5V on Top Layer "+5V_L01_P001" (solid, pour order 1): 105.207,73.584 102.946,73.584 102.743,73.406 102.743,67.361 102.895,67.208 104.267,67.208 104.267,69.063 104.292,69.037 106.629,69.037 106.629,70.942 106.299,71.272 104.521,71.272 104.521,72.898 105.308,72.898 106.197,72.898 106.324,73.025 106.324,75.057 106.197,75.184 105.308,75.184 105.207,75.082
VBUS on Top Layer "VBUS_L01_P000" (solid, pour order 0): 106.705,75.286 106.705,72.923 107.823,72.923 107.823,74.549 107.975,74.701 110.769,74.701 110.846,74.778 110.846,75.209 110.769,75.286 109.601,75.286
GND on Int2 (Gnd) "GND_L03_P004" (solid, pour order 4): 83.3,58.8 114,58.8 114,60.6 114,85.8 83.3,85.8
GND on Int1 (GND) "GND_L02_P007" (solid, pour order 7): 83.35,58.775 114.05,58.775 114.05,85.85 83.35,85.85

## Silkscreen, mask and mechanical layers (free items; w line width, h text height)
Top Overlay:
  drawing of 30 lines, arcs and shapes, not listed
Mechanical 1:
  the board outline again, w0.254

## Text inside footprints (layer, text, board x,y; h text height)
D1: Mechanical 13 "+" at 111.792,62.417 h0.5 r90
D2: Mechanical 13 "+" at 99.717,73.208 h0.5